# Altium PCB PPM_USB.PcbDoc
Units mil, origin at the board's own origin, x right, y up, seen from the top; angles counter-clockwise.
Board outline 1133.86 x 744.09 mil, 2 copper layers (Top Layer, Bottom Layer); 18 components, 15 nets, 68 pads, 6 vias.
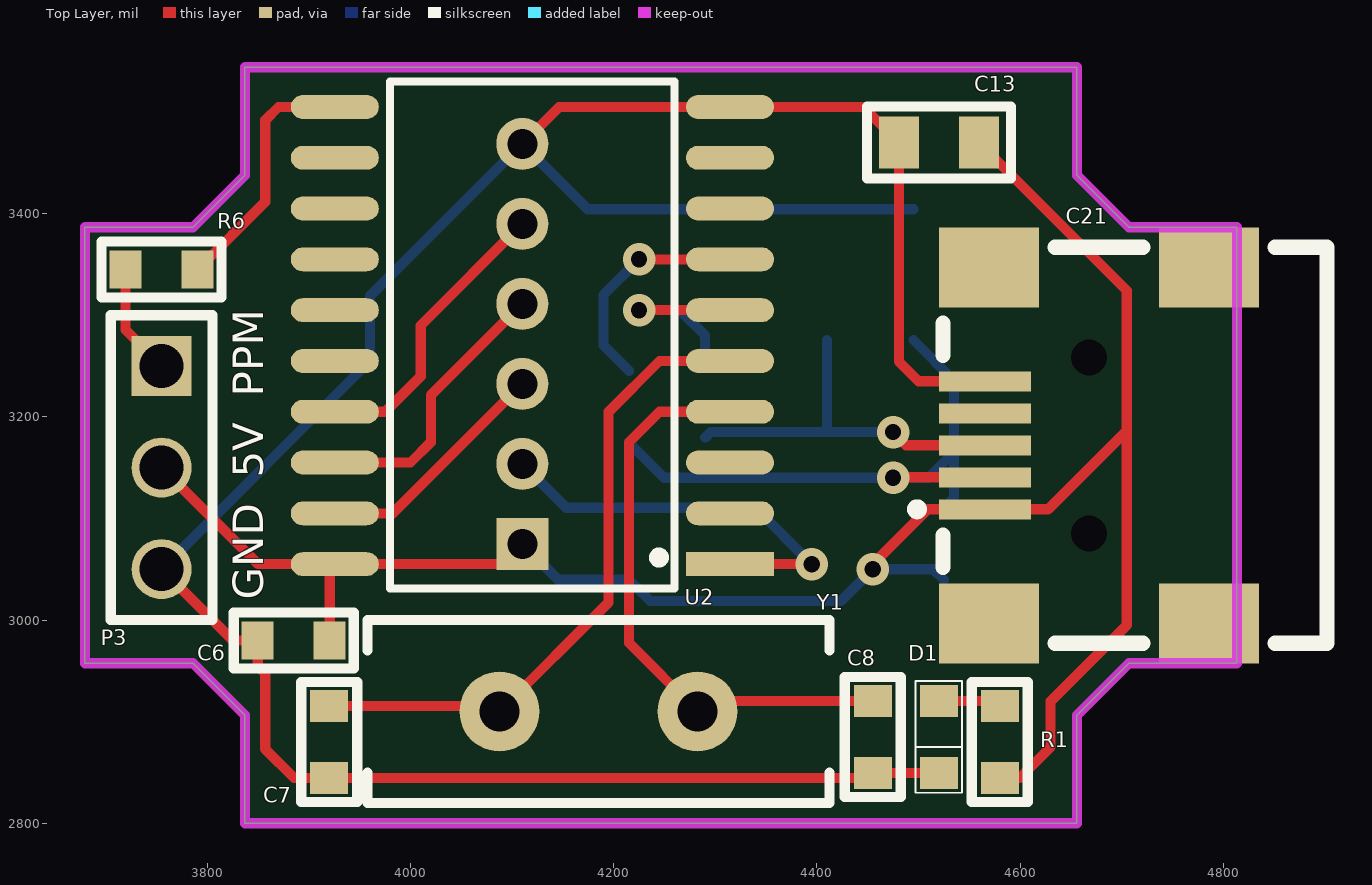
[diagram p0: Top Layer view]
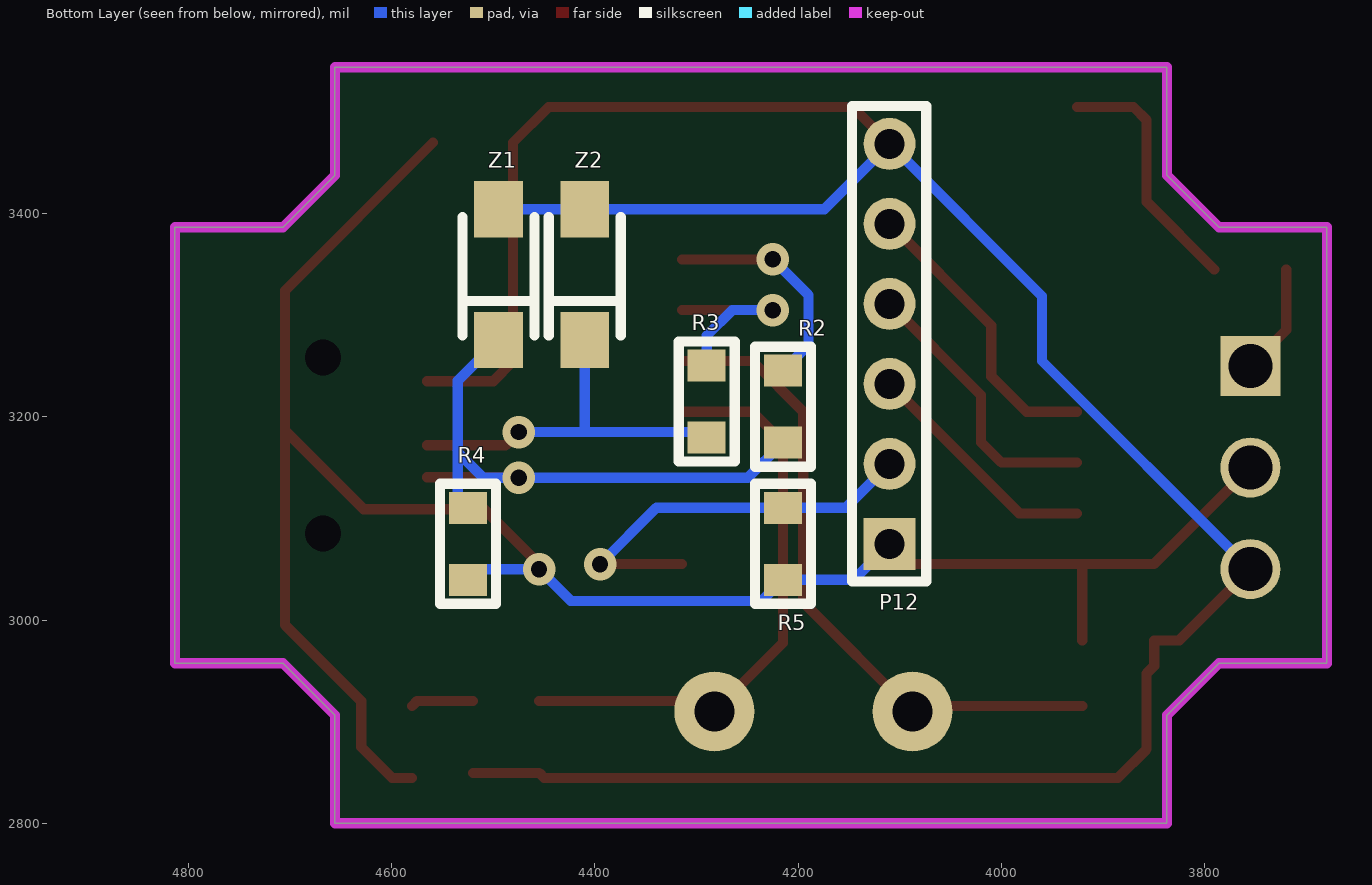
[diagram p1: Bottom Layer view, seen from below]

## Layer stack, top to bottom
Top Solder: solder mask 0.4, Solder Resist, Dk 3.5
Top Layer: signal copper 1.4
Dielectric 1: dielectric 12.6, FR-4, Dk 4.8
Bottom Layer: signal copper 1.4
Bottom Solder: solder mask 0.4, Solder Resist, Dk 3.5

## Board outline
3785.86,2957.45 3837.04,2906.27 3837.04,2799.97 4655.94,2799.97 4655.94,2906.27 4707.12,2957.45 4813.42,2957.45 4813.42,3386.59 4707.12,3386.59 4655.94,3437.77 4655.94,3544.07 3837.04,3544.07 3837.04,3437.77 3785.86,3386.59 3679.56,3386.59 3679.56,2957.45

## Design rules (kind name [scope] priority, off if disabled: settings)
Clearance [All] p1: gap=10
PolygonConnect [All] p1: connectstyle=Relief reliefconductorwidth=10 reliefentries=4 polygonreliefangle="90 Angle" airgapwidth=10
RoutingVias [All] p1: holewidth=28 width=50 viastyle="Through Hole" minholewidth=28 minwidth=50 maxholewidth=28 maxwidth=50
SolderMaskExpansion [All] p1: expansion=4
Width [All] p1: maxlimit=10 minlimit=10 preferedwidth=10
30 further rules are at their usual default settings.

## Components (designator, comment, footprint, x,y, rotation, side; value= is the part's Value field where it differs from the comment)
C6 "100nF" FP_0603_CAP_080 3885,2980 r0 top
C7 "27pF" FP_0603_CAP_080 3920,2880 r90 top
C8 "27pF" FP_0603_CAP_080 4455,2885 r90 top
C13 "22uF" FP_0805_CAP_085 4520,3470 r0 top
C21 "mini USB" USB/SM0.8-6H5 4675.62,3172.02 r0 top
D1 "GREEN" FP_0603_LED_G 4520,2885 r270 top
P3 "Header 1X3" HEADER_2.54MM_M_1x3 3755,3150 r270 top
P12 "ISP" HEADER_2.00MM_M_1x6 4110,3075 r90 bottom
R1 "390R" FP_0603_RES 4580,2880 r90 top
R2 "68R" FP_0603_RES 4215,3210 r270 bottom
R3 "68R" FP_0603_RES 4290,3215 r270 bottom
R4 "1K5" FP_0603_RES 4525,3075 r90 bottom
R5 "10K" FP_0603_RES 4215,3075 r90 bottom
R6 "10K" FP_0603_RES 3755,3345 r180 top
U2 "ATTiny2313" DIGITAL_SOIC20W 4120,3280 r270 top
Y1 "12Mhz" FP_CRYSTAL_HC49_TH 4185,2910 r0 top
Z1 "3V6" FP_SOD-123 4495,3340 r270 bottom
Z2 "3V6" FP_SOD-123 4410,3340 r270 bottom

## Footprints (in the part's own frame and the unit in brackets; to place one, negate y for a bottom-side part, rotate by r counter-clockwise, add the part's x,y. Pads: shape width x height; smd on the part's side, far side on the other; paste and mask are expansions set on the pad)
DIGITAL_SOIC20W [mm]
  rect 0.6x2.2 smd: 1(5.715,4.94)
  oval 0.6x2.2 smd: 2(4.445,4.94) 3(3.175,4.94) 4(1.905,4.94) 5(0.635,4.94) 6(-0.635,4.94) 7(-1.905,4.94) 8(-3.175,4.94) 9(-4.445,4.94) 10(-5.715,4.94) 11(-5.715,-4.94) 12(-4.445,-4.94) 13(-3.175,-4.94) 14(-1.905,-4.94) 15(-0.635,-4.94) 16(0.635,-4.94) 17(1.905,-4.94) 18(3.175,-4.94) 19(4.445,-4.94) 20(5.715,-4.94)
  silkscreen extent -6.35,-3.56 6.32,3.56, body extent -6.4,-5.15 6.4,5.15, height 2.7
FP_0603_CAP_080 [mm] "0.8mm magas 0603 kapacitás"
  rect 0.8x0.95 smd: 1(-0.9,0) 2(0.9,0)
  silkscreen extent -1.5,-0.7 1.5,0.7, body extent -0.8,-0.4 0.76,0.4, height 0.8
FP_0603_LED_G [mm] "0603 LED"
  rect 0.8x0.95 smd: A(-0.9,0) K(0.9,0)
  silkscreen extent -1.4,-0.58 1.4,0.58, body extent -0.8,-0.4 0.8,0.4, height 0.6
FP_0603_RES [mm] "0603 ellenállás"
  rect 0.8x0.95 smd: 1(-0.9,0) 2(0.9,0)
  silkscreen extent -1.5,-0.7 1.5,0.7, body extent -0.8,-0.4 0.8,0.4, height 0.44
FP_0805_CAP_085 [mm] "0805 kapacitás YAGEO 0.85mm magas"
  rect 1x1.3 smd: 1(-1,0) 2(1,0)
  silkscreen extent -1.8,-0.9 1.8,0.9, body extent -1,-0.64 1.03,0.64, height 0.85
FP_CRYSTAL_HC49_TH [mm] "HC49/SMD"
  round 2 hole 1: 1(-2.476,0) 2(2.477,0)
  silkscreen extent -5.78,-2.29 5.78,2.29, body extent -5.49,-2.29 5.49,2.21, height 3.6
FP_SOD-123 [mm]
  rect 1.41x1.22 smd: A(-1.635,0) K(1.635,0)
  silkscreen extent -1.44,-0.9 1.52,0.9, body extent -1.93,-0.85 1.92,0.85, height 1.47
HEADER_2.00MM_M_1x6 [mm]
  rect 1.3x1.3 hole 0.75: 1(0,0)
  round 1.3 hole 0.75: 2(2,0) 3(4,0) 4(6,0) 5(8,0) 6(10,0)
  silkscreen extent -0.94,-0.91 10.95,0.94
HEADER_2.54MM_M_1x3 [mm] "3×1 tüskesor"
  rect 1.5x1.5 hole 1.1: 1(-2.54,0)
  round 1.5 hole 1.1: 2(0,0) 3(2.54,0)
  silkscreen extent -3.81,-1.27 3.81,1.27, body extent -3.78,-1.27 3.79,1.27, height 8.54
USB/SM0.8-6H5 [mm] "Connector; USB2.0, Type B, SM; 5 Position; Right Angle"
  rect 2.3x0.5 smd: 1(-2.8,-1.6) 2(-2.8,-0.8) 3(-2.8,0) 4(-2.8,0.8) 5(-2.8,1.6)
  rect 2.5x2 smd: 6(-2.7,4.45) 7(2.8,4.45) 8(-2.7,-4.45) 9(2.8,-4.45)
  round 0.6 hole 0.9 unplated: MH1(-0.2,2.2) MH2(-0.2,-2.2)
  silkscreen extent -4.62,-4.95 5.75,4.95, body extent -3.51,-5.35 5.69,5.35, height 3.95

## Part data
C6 C7 C8 C13: library part CAP, "Capacitor"
D1: library part LED_G, "Typical LED"
P3: "Header, 3-Pin"
P12: library part "Header 6", "Header, 6-Pin"
R1 R2 R3 R4 R5 R6: library part RES, "Resistor"
Y1: library part XTAL, "Quartz"
Z1 Z2: library part ZENER, "Zener Diode"

## Via types
v1: diameter 32, hole 16, Top Layer to Bottom Layer, tented both sides, 6 vias

## Nets (pads, with @x,y where several pads share a name; then routed paths per layer and width w, separated by ;. In a path a pad name is that pad's centre, name@x,y a point inside that pad or via, vN(x,y) a via of type N, cw(c..) or ccw(c..) an arc to the next point about the centre after c; other vN are vias at no path point)
5V: C6.2 C13.2 C21.1 P3.2 P12.1 R1.1 R4.1 R5.1 U2.20 | length 1986.5
  Top Layer w10: P3.2 3850,3055 U2.20 4090,3055 P12.1 ; C6.2 U2.20@3920.43,3049.92 ; v1(4455,3050) 4455,3055 4509.03,3109.03 C21.1 4627.58,3109.03 4705,3186.45 ; C13.2 4705,3324.37 4705,3186.45 ; R1.1 4599.57,2844.57 4630,2875 4630,2920 4705,2995 4705,3186.45
  Bottom Layer w10: P12.1 4145.43,3039.57 R5.1 4235.75,3018.82 4423.82,3018.82 v1(4455,3050) 4514.57,3050 R4.1
GND: C6.1 C7.1 C8.1 C13.1 C21.5 D1.K P3.3 P12.6 U2.10 Z1.A Z2.A | length 2596.4
  Top Layer w10: P3.3 3825,2980 C6.1 3849.57,2955 3857.04,2947.53 3857.04,2872.96 3885.43,2844.57 C7.1 4450,2844.57 C8.1 D1.K ; P12.6 4146.3,3505 U2.10 4445.63,3505 C13.1 4480.63,3254.38 4500,3235.01 C21.5
  Bottom Layer w10: P3.3 3960,3255 3960,3318.7 P12.6 4174.33,3404.37 Z2.A Z1.A
MISO: P12.4 U2.18 | length 276.3
  Top Layer w10: U2.18 4000,3155 4020,3175 4020,3221.22 P12.4
MOSI: P12.5 U2.17 | length 290.4
  Top Layer w10: U2.17 3975,3205 4010,3240 4010,3289.96 P12.5
NetC7_2: C7.2 U2.5 Y1.1 | length 649.5
  Top Layer w10: C7.2 4082.07,2915.43 Y1.1 4195,3017.5 4195,3205 4245,3255 U2.5
NetC8_2: C8.2 U2.4 Y1.2 | length 581.7
  Top Layer w10: U2.4 4245,3205 4215,3175 4215,2977.52 Y1.2 4292.95,2920.43 C8.2
NetC21_2: C21.2 R2.2 R4.2 Z1.K | length 621.2
  Top Layer w10: v1(4475,3140) 4475.52,3140.52 C21.2
  Bottom Layer w10: R2.2 4249.57,3140 v1(4475,3140) 4510,3140 4535,3165 ; Z1.K 4535,3235.63 4535,3165 ; R4.2 4535,3120.43 4535,3165
NetC21_3: C21.3 R3.2 Z2.K | length 373.6
  Top Layer w10: v1(4475,3185) 4487.98,3172.02 C21.3
  Bottom Layer w10: R3.2 4295.43,3185 4410,3185 ; Z2.K 4410,3185 ; v1(4475,3185) 4410,3185
NetD1_A: D1.A R1.2 | length 62.1
  Top Layer w10: D1.A 4575,2920.43 R1.2
NetR2_1: R2.1 U2.7 | length 223.9
  Top Layer w10: v1(4225,3355) U2.7
  Bottom Layer w10: R2.1 4190,3270.43 4190,3320 v1(4225,3355)
NetR3_1: R3.1 U2.6 | length 194.4
  Top Layer w10: v1(4225,3305) U2.6
  Bottom Layer w10: v1(4225,3305) 4265,3305 4290,3280 R3.1
NetR6_1: R6.1 U2.11 | length 248.5
  Top Layer w10: R6.1 3857.04,3411.61 3857.04,3492.04 3870,3505 U2.11
PPM: P3.1 R6.2 | length 109.7
  Top Layer w10: R6.2 3719.57,3285.43 P3.1
RESET: P12.2 R5.2 U2.1 | length 406.4
  Top Layer w10: U2.1 v1(4395,3055)
  Bottom Layer w10: P12.2 4153.31,3110.43 R5.2 4339.57,3110.43 v1(4395,3055)
SCK: P12.3 U2.19 | length 237.3
  Top Layer w10: U2.19 3982.52,3105 P12.3
pads on no net: C21.4 C21.6 C21.7 C21.8 C21.9 C21.MH1 C21.MH2 U2.2 U2.3 U2.8 U2.9 U2.12 U2.13 U2.14 U2.15 U2.16

## Keep-outs
Keep-Out Layer:
  the board outline again, w10

## Silkscreen, mask and mechanical layers (free items; w line width, h text height)
Top Overlay:
  text "PPM" at 3855,3220 h30 r90
  text "5V" at 3855,3140 h30 r90
  text "GND" at 3855,3020 h30 r90
Mechanical 15:
  circle w10: c3746.49,2866.9 r78.74
  circle w10: c3746.49,3477.14 r78.74
  circle w10: c4746.49,3477.14 r78.74
  circle w10: c4746.49,2866.9 r78.74
  lines w10: 3589.01,2709.42 4903.97,2709.42 4903.97,3634.62 3589.01,3634.62 3589.01,2709.42 ; 3667.75,2788.16 3667.75,3555.88 4825.23,3555.88 4825.23,2788.16 3667.75,2788.16

## Text inside footprints (layer, text, board x,y; h text height)
C21: Mechanical 1 "PCB Edge" at 4891.46,3013.1 h9.84 r90